# Altium PCB SupplyBoxTest_v2.PcbDoc
Units mil, origin at the board's own origin, x right, y up, seen from the top; angles counter-clockwise.
Board outline 2250 x 1700 mil, 2 copper layers (Top Layer, Bottom Layer), stack 65.8 mil thick; 15 components, 11 nets, 65 pads, 87 vias.
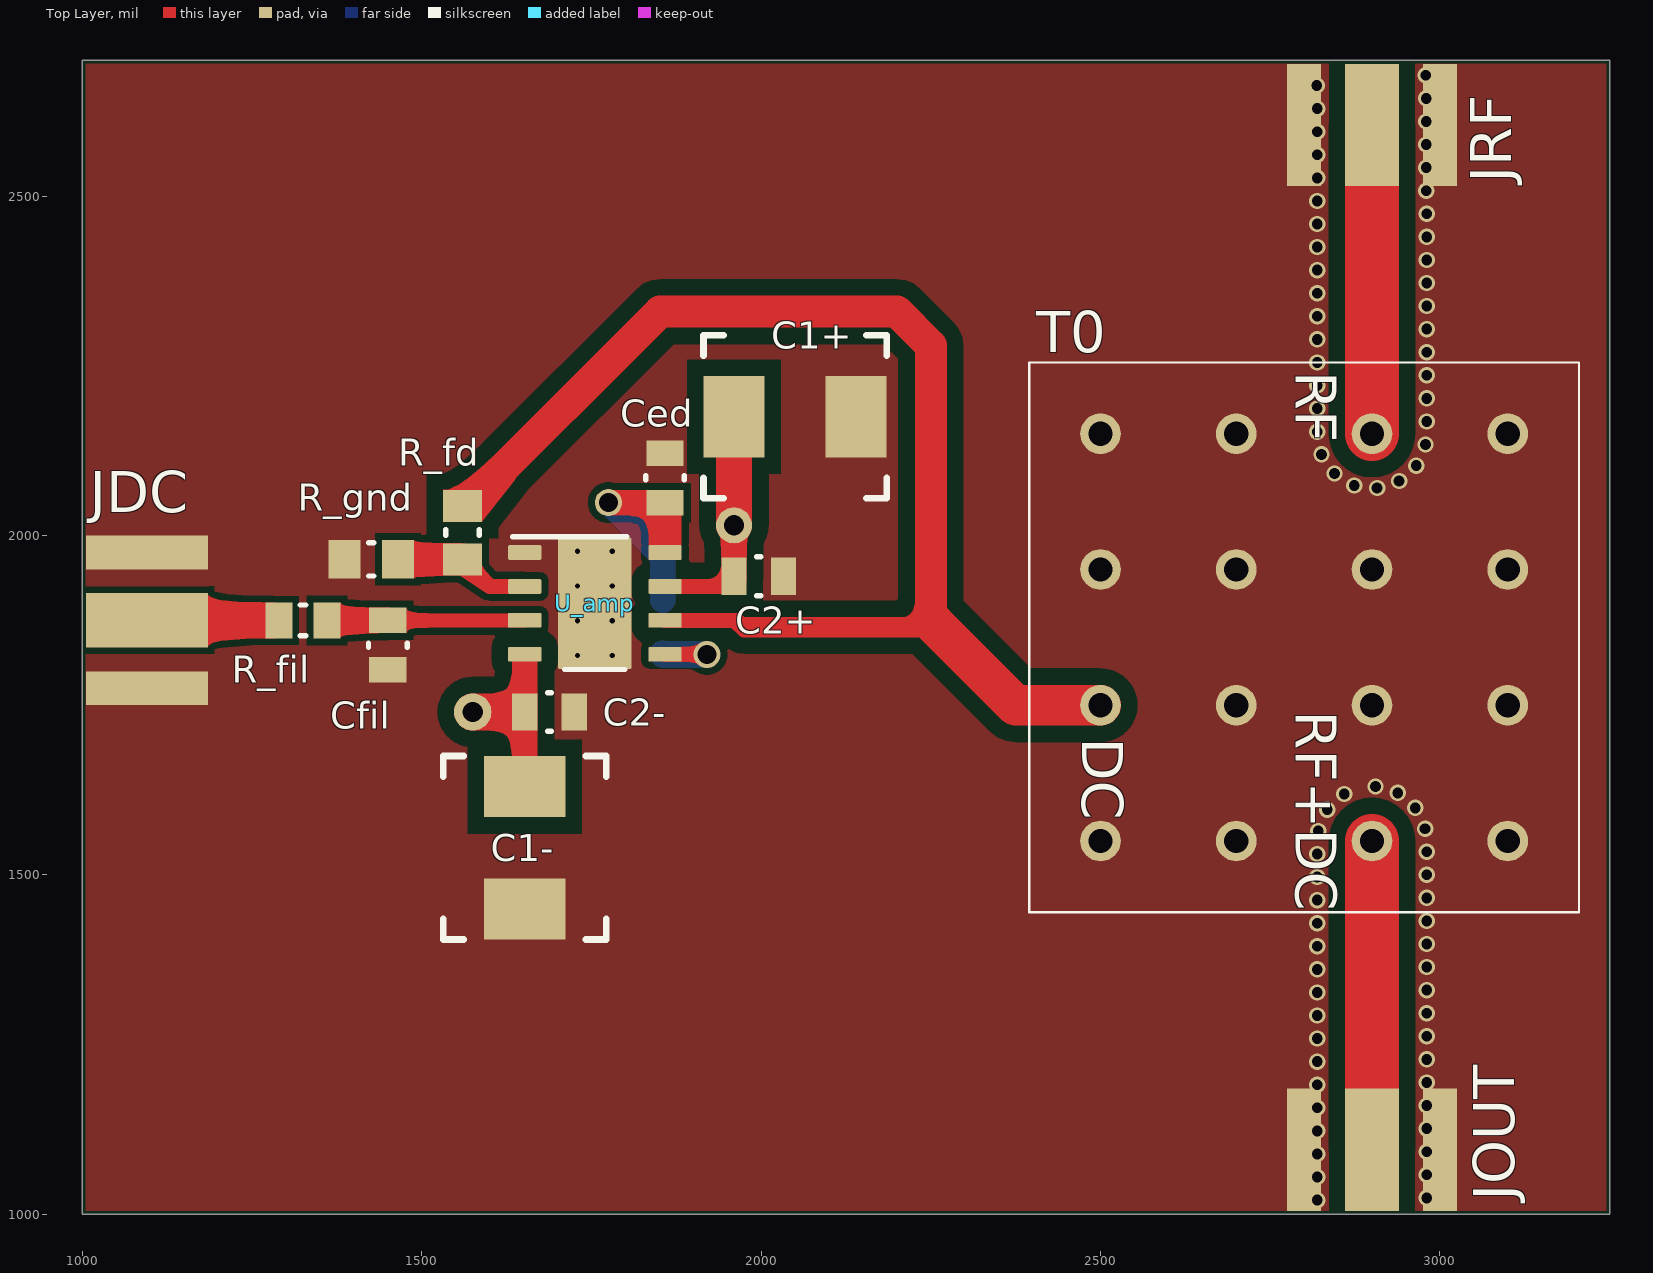
[diagram p0: Top Layer view]
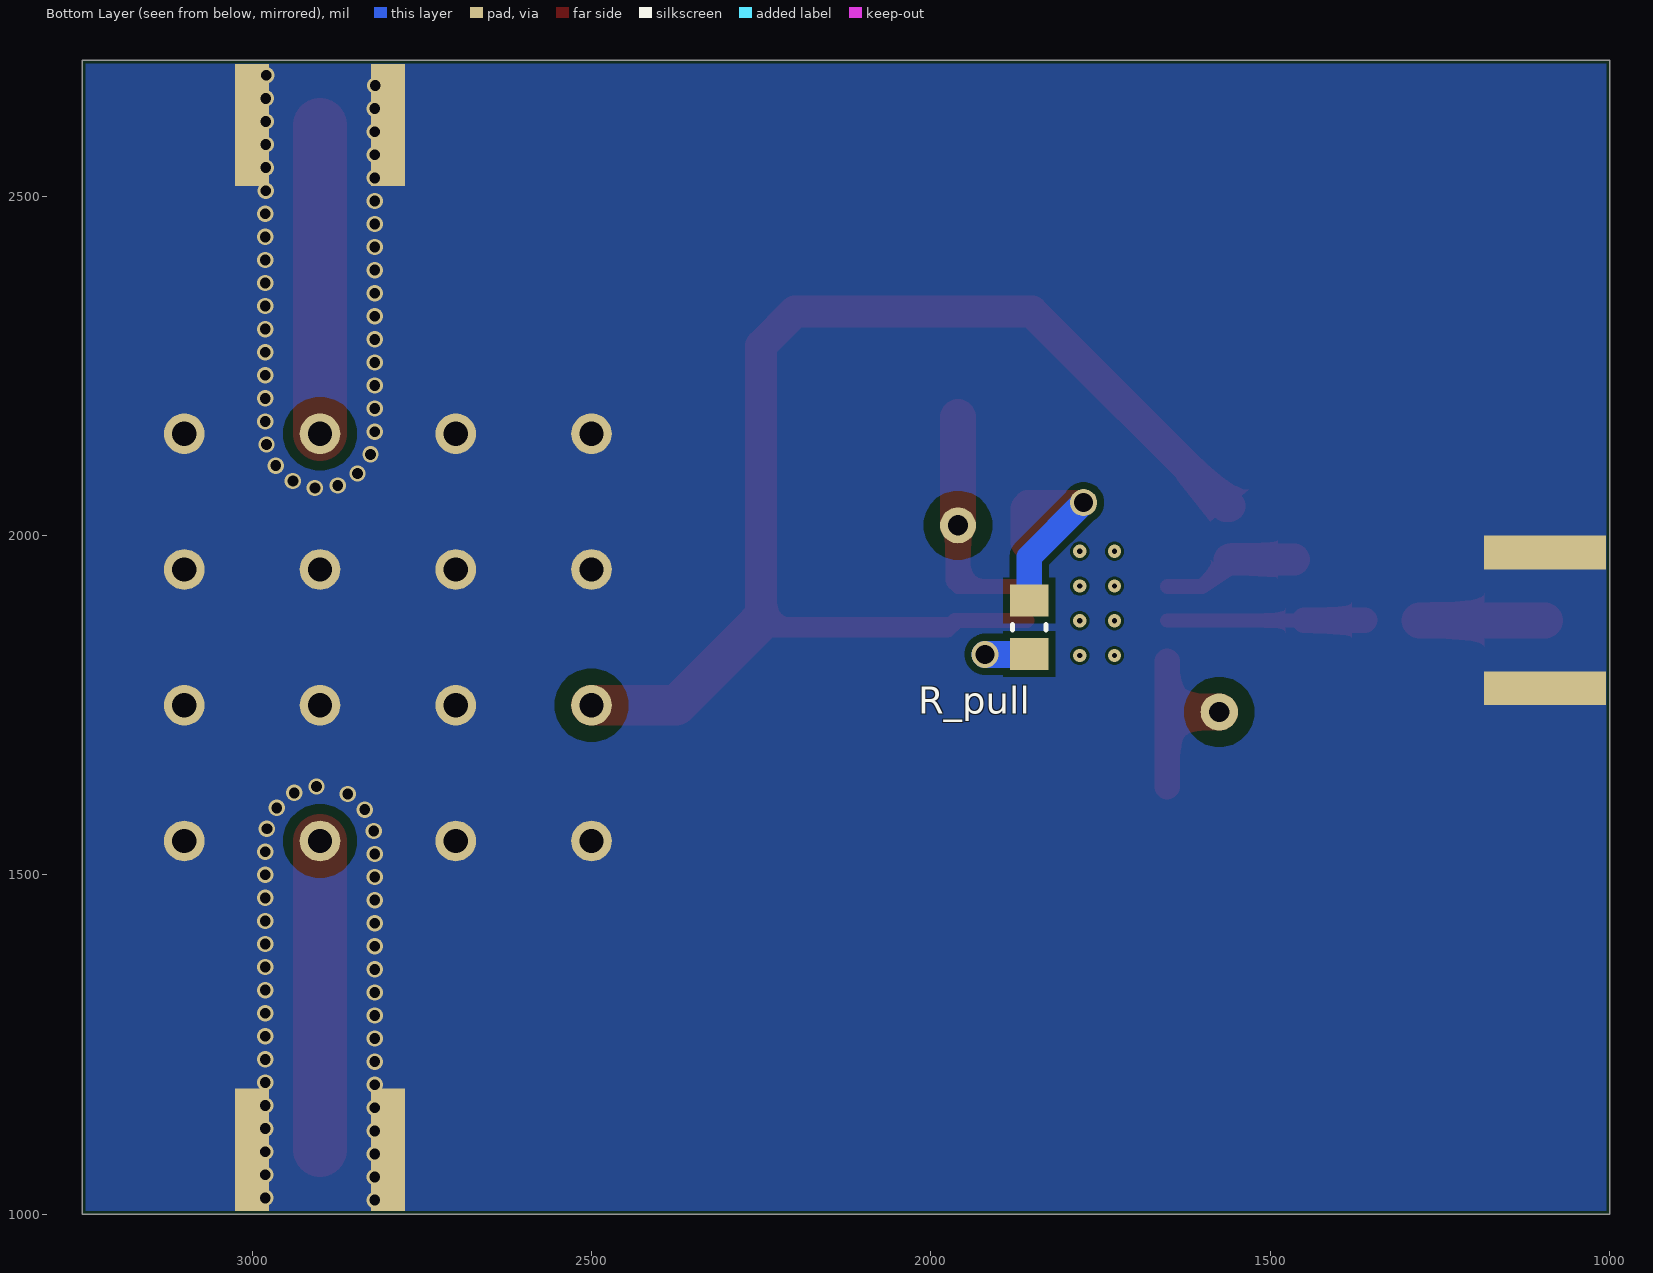
[diagram p1: Bottom Layer view, seen from below]
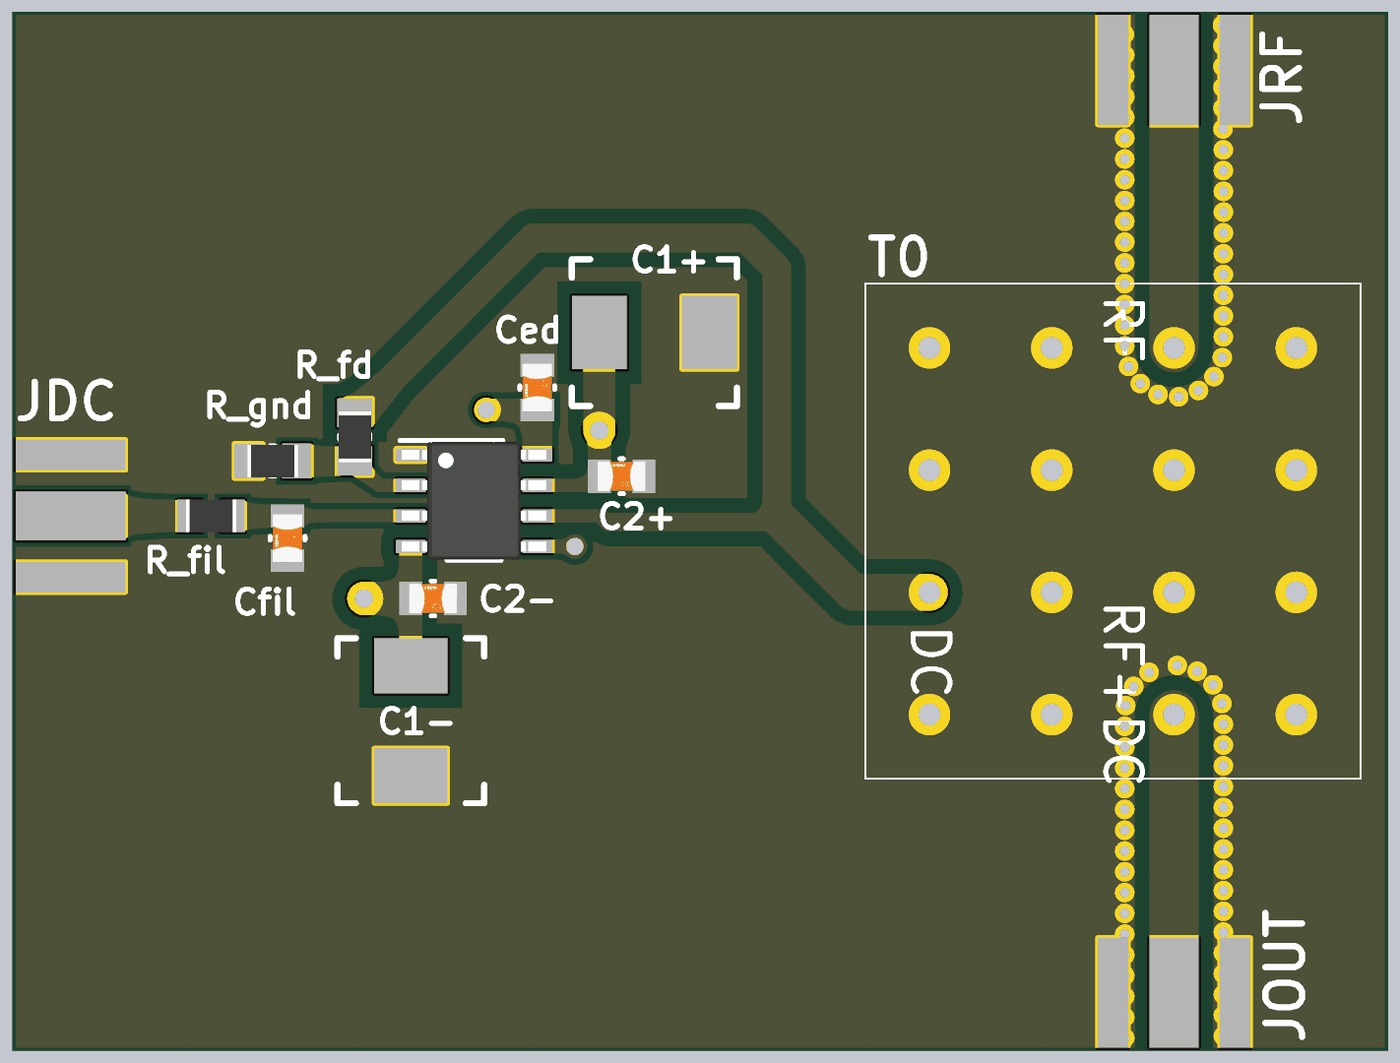
[diagram p2: 3D render of the assembled board from above, using the file's embedded part models]

## Layer stack, top to bottom
Top Solder: solder mask 0.4, Solder Resist, Dk 3.5
Top Layer: signal copper 1.4
Dielectric 1: dielectric 63, FR-4, Dk 4.8
Bottom Layer: signal copper 1.4
Bottom Solder: solder mask 0.4, Solder Resist, Dk 3.5

## Board outline
1000,1000 3250,1000 3250,2700 1000,2700

## Design rules (kind name [scope] priority, off if disabled: settings)
Clearance Clearance_RF [InNet('GND') vs InNetClass('RF')] p1: gap=24 ignorepadtopadclearanceinfootprint=FALSE
Clearance Clearance_LV [InNet('GND') vs InNetClass('LV')] p2: gap=10 ignorepadtopadclearanceinfootprint=FALSE
Clearance Clearance_HV [InNet('GND') vs InNetClass('HV')] p3: gap=24 ignorepadtopadclearanceinfootprint=FALSE
Clearance [All] p4: gap=4 ignorepadtopadclearanceinfootprint=FALSE
MinimumSolderMaskSliver [All] p1: minsoldermaskwidth=3
PlaneConnect [All] p1: planeconnectstyle=Direct reliefexpansion=20 reliefentries=4 reliefconductorwidth=10 reliefairgap=10
PolygonConnect [All] p1: connectstyle=Direct reliefconductorwidth=10 reliefentries=4 polygonreliefangle="90 Angle" airgapwidth=10
RoutingVias [All] p1: holewidth=28 width=50 viastyle="Through Hole" minholewidth=28 minwidth=50 maxholewidth=28 maxwidth=50
SilkToSilkClearance [All] p1: silktosilkclearance=3
SilkToSolderMaskClearance [IsPad] p1: minsilkscreentomaskgap=3 clearancetoexposedcopper=TRUE
SolderMaskExpansion [All] p1: expansion=4 istentingtop=FALSE
SupplyNets "Schematic Supply Nets_3" [InNet('+50V')] p1: voltage=0.000
SupplyNets "Schematic Supply Nets_2" [InNet('-50V')] p2: voltage=0.000
SupplyNets "Schematic Supply Nets_1" [InNet('GND')] p3: voltage=0.000
SupplyNets "Schematic Supply Nets" [InNet('+5V')] p4: voltage=0.000
ViasUnderSMD [All] p1: allowed=TRUE
Width [All] p1: maxlimit=160 minlimit=4 preferedwidth=40
26 further rules are at their usual default settings.

## Classes and differential pairs
net class LV: +5V NetCfil_1 NetJDC_1 NetR_fd_1 NetR_pull_2
net class HV: +50V -50V NetR_fd_2
net class RF: NetJOUT_1 NetJRF_1

## Components (designator, comment, footprint, x,y, rotation, side; value= is the part's Value field where it differs from the comment)
C1+ "10u" RAHV1100M1UCC8002E-Footprint-1 2050,2175 r270 top
C1- "10u" RAHV1100M1UCC8002E-Footprint-1 1651.65,1540 r180 top
C2+ "100n" FP-CC0805-0_85-MFG 1996.42,1940 r180 top value="100 nF"
C2- "100n" FP-CC0805-0_85-MFG 1688.07,1740 r180 top value="100 nF"
Ced "100n" FP-CC0805-0_85-MFG 1858.35,2085 r270 top value="100 nF"
Cfil "100n" FP-CC0805-0_85-MFG 1450,1838.58 r270 top value="100 nF"
JDC "SMA Connecor Smaller" SMA_Smaller 1095,1875 r90 top
JOUT "SMA Connecor Smaller" SMA_Smaller 2900,1095 r180 top
JRF "SMA Connecor Smaller" SMA_Smaller 2900,2605 r0 top
R_fd "33k" RESC2013X60X35ML10T20 1560,2004.37 r90 top
R_fil "4.7k" RESC2013X60X35NL10T20 1325,1875 r0 top
R_gnd "10k" RESC2013X60X35ML10T20 1425.63,1965 r0 top
R_pull "10k" RESC2013X60X35ML10T20 1855,1865 r270 bottom
T0 "PBTC-1GW+" PBTC-1GW+ 2800,1850 r270 top
U_amp "OPA454AIDDA" DDA0008C_L 1755,1900 r0 top

## Footprints (in the part's own frame and the unit in brackets; to place one, negate y for a bottom-side part, rotate by r counter-clockwise, add the part's x,y. Pads: shape width x height; smd on the part's side, far side on the other; paste and mask are expansions set on the pad)
DDA0008C_L [mm] "SOP, 8-Leads, Body 4x5mm, Pitch 1.27mm, Thermal Pad 2.4x3mm, IPC High Density"
  rrect18% 1.25x0.55 smd: 1(-2.625,1.905) 2(-2.625,0.635) 3(-2.625,-0.635) 4(-2.625,-1.905) 5(2.625,-1.905) 6(2.625,-0.635) 7(2.625,0.635) 8(2.625,1.905)
  rrect4% 2.747x4.9 smd paste-1.5 mask-1.5: 9(0,0)
  rrect4% 2.49x3 on Top Paste: 9(0,0)
  rrect4% 2.49x3 on Top Solder: 9(0,0)
  silkscreen extent -3.08,-2.47 1.2,2.5, body extent -3.01,-2.45 3.01,2.45, height 1.7
FP-CC0805-0_85-MFG [mm]
  rect 0.95x1.4 smd paste+0 mask+0: 1(-0.925,0) 2(0.925,0)
  silkscreen extent -0.08,-0.72 0.08,0.72, body extent -1.6,-1.05 1.6,1.05, height 0.25
PBTC-1GW+ [mil] "Mini-Circuits Bias-Tee"
  round 60 hole 36: 1(-300,-300) 2(-100,-300) 3(100,-300) 4(300,-300) 5(-300,-100) 6(-100,-100) 7(100,-100) 8(300,-100) 9(-300,100) 10(-100,100) 11(100,100) 12(300,100) 13(-300,300) 14(-100,300) 15(100,300) 16(300,300)
  silkscreen extent -405,-405 405,405
RAHV1100M1UCC8002E-Footprint-1 [mil]
  rect 120x90 smd: 1(0,90) 2(0,-90)
  silkscreen extent -120,-135 120,135
RESC2013X60X35ML10T20 [mm] "Chip Resistor, 2-Leads, Body 2.1x1.35mm, IPC Low Density"
  rect 1.2x1.45 smd: 1(-1,0) 2(1,0)
  silkscreen extent -0.1,-0.63 0.1,0.63, body extent -1.05,-0.68 1.05,0.67, height 0.6
RESC2013X60X35NL10T20 [mm] "Chip Resistor, 2-Leads, Body 2.1x1.35mm, IPC Medium Density"
  rect 1x1.35 smd: 1(-0.9,0) 2(0.9,0)
  silkscreen extent -0.1,-0.58 0.1,0.58, body extent -1.05,-0.68 1.05,0.67, height 0.6
SMA_Smaller [mil] "Our smaller SMA connectors purchased from amazon.com"
  rect 80x180 smd: 1(0,0)
  rect 50x180 smd: 2(100,0) 3(-100,0)
  rect 50x180 smd far side: 4(100,0) 5(-100,0)

## Part data
C1+ C1-: library part CMP-001-00083-1, "Aluminum Electrolytic Capacitor, Polarized, Aluminum (solid Polymer), 50V, 20% +Tol, 20% -Tol, 10uF, Surface Mount, 2121", RoHS Compliant=Yes
C2+ C2- Ced Cfil: library part CMP-1036-04410-2, "CAP CER 0.1UF 25V X7R 0805", Capacitance="100 nF", Manufacturer=Yageo, Manufacturer Part Number=CC0805KRX7R8BB104, Package=CC0805-0.85, Temperature="-30°C to +85°C", Temperature Characteristic=X7R, Temperature Range High=+85°C, Temperature Range Low=-30°C, Tolerance=0.1, Voltage Rating="25 V", Automotive=No, Category=Cap, ComponentLink2Description=Datasheet, ComponentLink2URL=http://www.yageo.com/documents/recent/UPY-GPHC_Y5V_6.3V-to-50V_8.pdf, Device Class L1="Passive Components", Device Class L2=Capacitors, Device Class L3="Ceramic Capacitors", Digikey Description="CAP CER 0.1UF 25V X7R 0805", Footprint Url=http://www.yageo.com/exep/pages/download/literatures/UPY-C_GEN_24.pdf, Height=0.95mm, Ipc Land Pattern Name=CAPC200125X85, Lead Free=Yes, Material=Ceramic, Mouser Description="Multilayer Ceramic Capacitors MLCC - SMD/SMT 100nF 25V X7R 10%", Octopart=https://octopart.com/cc0805krx7r8bb104-yageo-39467766, RoHS=TRUE
JDC JOUT JRF: library part CMP-002-00071-1, "Smaller SMA connector we bought from amazon.com"
R_fd: library part CMP-1013-00567-2, "Chip Resistor, 3.3 KOhm, +/- 1%, 0.125 W, -55 to 155 degC, 0805 (2012 Metric), RoHS, Tape and Reel", Case Code (Imperial)=0805, Case Code (Metric)=2012, Manufacturer=Yageo, Max Operating Temperature=155degC, Max Power Dissipation=125mW, Min Operating Temperature=-55degC, Package Description="2-Pin Surface Mounted Device, Body 2 x 1.25 mm", Package Quantity=1, Resistance=3.3KOhm, Temperature Coefficient=100ppm/degreesC, Tolerance=1%, Voltage Rating=150V, Case/Package=0805, Composition=ThickFilm, Datasheet URL=http://www.yageo.com/NewPortal/yageodocoutput?fileName=/pdf/R-Chip/PYu-RC_Group_51_RoHS_L_5.pdf, Datasheet Version="Rev. 5, 10/2016", Depth=1.25mm, Height=0.5mm, Lead Free=LeadFree, Length=2mm, Manufacturer URL=http://www.yageo.com/, Number of Terminations=2, Package Reference=0805, Packaging=TapeandReel, Power Rating=125mW, REACH SVHC=NoSVHC, RoHSCompliant=true, Termination=SMD/SMT, Weight=0.000194oz, Width=0.049inch
R_fil: library part CMP-1659-00011-4, "Chip Resistor, 47 KOhm, +/- 1%, 0.125 W, -55 to 155 degC, 0805 (2012 Metric), RoHS, Tape and Reel", Manufacturer=Yageo, Max Operating Temperature="155 degC", Min Operating Temperature="-55 degC", Package Quantity=200, Voltage Rating="150 V", ComponentLink1Description="Manufacturer URL", ComponentLink1URL=http://www.yageo.com/, ComponentLink2Description=Datasheet, ComponentLink2URL=http://www.yageo.com/documents/recent/PYu-RC_Group_51_RoHS_L_04.pdf, DatasheetVersion="Rev. 4, 02/2016", Height="0.5 mm", Length="2 mm", Mount="Surface Mount", Mounting Technology="Surface Mount", PackageDescription="2-Pin Surface Mounted Device, Body 2 x 1.25 mm", PackageReference=0805, Packaging="Tape and Reel", Pins=2, REACH SVHC="No SVHC", RoHSCompliant=true
R_gnd R_pull: library part CMP-2100-03671-1, "Chip Resistor, 1 KOhm, +/- 1%, 125 mW, -55 to 155 degC, 0805 (2012 Metric), RoHS, Tape and Reel", Case Code (Imperial)=0805, Case Code (Metric)=2012, Manufacturer=Yageo, Max Operating Temperature=155degC, Max Power Dissipation=125mW, Min Operating Temperature=-55degC, Package Description="2-Pin Surface Mounted Device, Body 2 x 1.25 mm", Package Quantity=1, Resistance=1KOhm, Temperature Coefficient=100ppm/degreesC, Tolerance=1%, Voltage Rating=150V, Case/Package=0805, Composition=ThickFilm, Datasheet URL=http://www.yageo.com/NewPortal/yageodocoutput?fileName=/pdf/R-Chip/PYu-RC_Group_51_RoHS_L_5.pdf, Datasheet Version="Rev. 5, 10/2016", Depth=1.25mm, Height=0.024inch, Lead Free=LeadFree, Length=0.079inch, Manufacturer URL=http://www.yageo.com/, Military Standard=Not, Number of Pins=2, Number of Terminations=2, Package Reference=0805, Packaging=TapeandReel, Power Rating=125mW, REACH SVHC=Unknown, RoHSCompliant=true, Termination=SMD/SMT, Voltage Rating (DC)=150V, Width=0.049inch
T0: library part CMP-00000-1, "Mini-Circuit Bias-Tee, version 2"
U_amp: library part CMP-0017-00714-2, "High Voltage (100V), High-Current (50mA) Operational Amplifier, G=1 Stable, 10 to 100 V, -55 to 125 degC, 8-pin SOP (DDA8), Green (RoHS & no Sb/Br)", Manufacturer="Texas Instruments", Rating=Catalog, Total Supply Voltage(Max)(+5V is 5, +/-5V is 10)=100, Total Supply Voltage(Min)(+5V is 5, +/-5V is 10)=10, CMRR(Min)(dB)=100, Code_JEDEC=MS-012, ComponentLink1Description="Manufacturer URL", ComponentLink1URL=http://www.ti.com/, ComponentLink2Description=Datasheet, ComponentLink2URL=http://www.ti.com/lit/ds/symlink/opa454.pdf, ComponentLink3Description="Package Specification", ComponentLink3URL=http://www.ti.com/litv/pdf/mpds092e, DatasheetVersion=SBOS391A, Eco-Plan="Green (RoHS & no Sb/Br)", GBW(Typ)(MHz)=2.5, IIB(Max)(pA)=100, Iq per channel(Max)(mA)=4, Mounting Technology="Surface Mount", Number of Channels=1, Offset Drift(Typ)(uV/C)=1.6, PackageDescription="8-Pin PowerPAD(TM) Plastic Small Outline, Body 3.9 x 4.9 mm, Pitch 1.27 mm", PackageReference=DDA0008C, PackageVersion="4202561/F, 12/2011", PartNumber=OPA454AIDDA, Slew Rate(Typ)(V/us)=13, Sub Family="General Purpose Amplifier, High Output Current Amplifier (>=50mA), High Supply Voltage Amplifier (>=30V), Precision Amplifier", Vio (25C)(Max)(mV)=4, Vn at 1kHz(Typ)(nV/rtHz)=47

## Free pads (board coordinates)
  round 55 hole 30: 1(1575,1740)
  round 53 hole 30: 2(1960,2015)
  round 40 hole 28: 3(1775,2048.58)

## Via types
v1: diameter 24, hole 16, Top Layer to Bottom Layer, 78 vias
v2: diameter 19.68, hole 7.87, Top Layer to Bottom Layer, tented both sides, 4 vias
v3: diameter 19.68, hole 7.87, Top Layer to Bottom Layer, 4 vias
v4: diameter 40, hole 28, Top Layer to Bottom Layer, tented both sides, 1 vias

## Nets (pads, with @x,y where several pads share a name; then routed paths per layer and width w, separated by ;. In a path a pad name is that pad's centre, name@x,y a point inside that pad or via, vN(x,y) a via of type N, cw(c..) or ccw(c..) an arc to the next point about the centre after c; other vN are vias at no path point)
+5V: Ced.2 pad.3 R_pull.1 U_amp.8 | length 310.7
  Top Layer w37: pad.3 Ced.2
  Top Layer w49: 1858.35,1990 Ced.2@1858.35,2040
  Bottom Layer w37: pad.3 1855,1968.58 R_pull.1
+50V: C1+.2 C2+.2 pad.2 U_amp.7 | length 443.3
  Top Layer w22: U_amp.7 1960,1925 U_amp.7
  Top Layer w37: C2+.2@1960,1935 pad.2
  Top Layer w53: pad.2 C1+.2
-50V: C1-.2 C2-.2 pad.1 U_amp.4 | length 250
  Top Layer w37.5: C1-.2 C2-.2 U_amp.4@1651.65,1815
  Top Layer w55: pad.1 C2-.2@1640,1740
GND: C1+.1 C1-.1 C2+.1 C2-.1 Ced.1 Cfil.2 JDC.2 JDC.3 JDC.4 JDC.5 JOUT.2 JOUT.3 JOUT.4 JOUT.5 JRF.2 JRF.3 JRF.4 JRF.5 R_gnd.1 T0.1 T0.2 T0.4 T0.5 T0.6 T0.7 T0.8 T0.10 T0.11 T0.13 T0.14 T0.15 T0.16 U_amp.1 U_amp.9@1755,1900
  other v1: 2819.31,1020.83 2980.69,1024.17 2819.31,1054.83 2980.69,1058.17 2819.31,1088.83 2980.69,1092.17 2819.31,1122.83 2980.69,1126.17 2819.31,1156.83 2980.69,1160.17 2819.31,1190.83 2980.69,1194.17 2819.31,1224.83 2980.69,1228.17 2819.31,1258.83 2980.69,1262.17 2819.31,1292.83 2980.69,1296.17 2819.31,1326.83 2980.69,1330.17 2819.31,1360.83 2980.69,1364.17 2819.31,1394.83 2980.69,1398.17 2819.31,1428.83 2980.69,1432.17 2819.31,1462.83 2980.69,1466.17 2819.31,1496.83 2980.69,1500.17 2819.31,1530.83 2980.69,1534.17 2820.91,1564.79 2978.33,1568.09 2834.12,1596.12 2963.8,1598.83 2859.11,1619.17 2937.92,1620.88 2905.27,1630.35 2907.6,2069.96 2873.82,2073.88 2939.98,2080.31 2844.79,2091.58 2965.25,2103.06 2825.61,2119.65 2978.94,2134.18 2819.31,2153.06 2980.69,2168.14 2819.31,2187.06 2980.69,2202.14 2819.31,2221.06 2980.69,2236.14 2819.31,2255.06 2980.69,2270.14 2819.31,2289.06 2980.69,2304.14 2819.31,2323.06 2980.69,2338.14 2819.31,2357.06 2980.69,2372.14 2819.31,2391.06 2980.69,2406.14 2819.31,2425.06 2980.69,2440.14 2819.31,2459.06 2980.69,2474.14 2819.31,2493.06 2980,2508.14 2819.31,2527.06 2980,2542.14 2819.31,2561.06 2980,2576.14 2819.31,2595.06 2980,2610.14 2819.31,2629.06 2980,2644.14 2818.62,2663.06 2979.31,2678.14
  other v2: 1729.41,1823.23 1780.59,1823.23 1729.41,1976.77 1780.59,1976.77
  other v3: 1729.41,1874.41 1780.59,1874.41 1729.41,1925.59 1780.59,1925.59
NetCfil_1: Cfil.1 R_fil.2 U_amp.3 | length 291.2
  Top Layer w21: Cfil.1 U_amp.3
  Top Layer w37.5: R_fil.2 Cfil.1
NetJDC_1: JDC.1 R_fil.1 | length 185
  Top Layer w53: JDC.1 R_fil.1@1280,1875
NetJOUT_1: JOUT.1 T0.12 | length 455
  Top Layer w80: JOUT.1 T0.12
NetJRF_1: JRF.1 T0.9 | length 455
  Top Layer w80: T0.9 JRF.1
NetR_fd_1: R_fd.1 R_gnd.2 U_amp.2 | length 183.3
  Top Layer w22: R_fd.1 R_fd.1@1564.92,1965 ; R_fd.1@1577.54,1947.46 1600,1925 U_amp.2
  Top Layer w47: R_gnd.2 R_fd.1
NetR_fd_2: R_fd.2 T0.3 U_amp.6 | length 1928.2
  Top Layer w22: U_amp.6@1858.52,1874.83 U_amp.6 1962.63,1875 ; 2237.44,1862.44 2250,1875
  Top Layer w25: 1964.13,1873.5 1975.19,1862.44
  Top Layer w30: 1976.19,1864.94 2237.44,1864.9
  Top Layer w47: R_fd.2 1564.92,2043.74 1851.18,2330 2200,2330 2250,2280 2250,1875
  Top Layer w60: 2255,1870 2375,1750 T0.3
NetR_pull_2: R_pull.2 U_amp.5 | length 126.9
  Top Layer w22: U_amp.5 v4(1920,1825)
  Bottom Layer w40: R_pull.2 1855.63,1825 v4(1920,1825)
pads on no net: U_amp.9@1755,1900

## Polygon pours and split planes (outlines as drawn)
GND on Bottom Layer "GND_L02_P001" (solid, pour order 1): 1005,2695 1005,1005 3245,1005 3245,2695
GND on Top Layer "GND_L01_P000" (solid, pour order 0): 1005,2695 1005,1005 3245,1005 3245,2695

## Text inside footprints (layer, text, board x,y; h text height)
T0: Top Overlay "RF+DC" at 2788,1742 h60 r270; Top Overlay "RF" at 2788,2242 h60 r270; Top Overlay "DC" at 2473,1702 h60 r270